# Altium PCB 贴片按键.pcbdoc
Units mm, origin at the board's own origin, x right, y up, seen from the top; angles counter-clockwise.
Board outline 29.17 x 29.3 mm, 2 copper layers (Top Layer, Bottom Layer); 1 components, 0 nets, 6 pads, 0 vias.
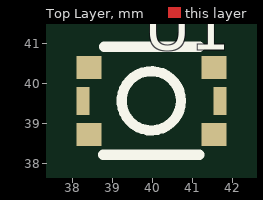
[diagram p0: Top Layer view]
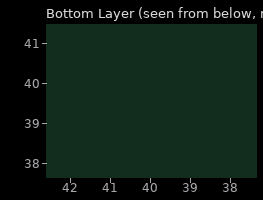
[diagram p1: Bottom Layer view, seen from below]

## Layer stack, top to bottom
Top Layer: signal copper (thickness not stored)
Dielectric: dielectric 0.32, FR-4, Dk 4.8
Bottom Layer: signal copper (thickness not stored)

## Board outline
54.567,25.4 25.4,25.4 25.4,54.702 54.567,54.702

## Components (designator, comment, footprint, x,y, rotation, side; value= is the part's Value field where it differs from the comment)
U1 "SW-SMD_4P-L3.0-W2.7-P1.66-LS3.5" SW-SMD_4P-L3.0-W2.7-P1.66-LS3.5 39.975,39.577 r0 top

## Footprints (in the part's own frame and the unit in brackets; to place one, negate y for a bottom-side part, rotate by r counter-clockwise, add the part's x,y. Pads: shape width x height; smd on the part's side, far side on the other; paste and mask are expansions set on the pad)
SW-SMD_4P-L3.0-W2.7-P1.66-LS3.5 [mm]
  rect 0.625x0.575 smd: 1(-1.562,0.837) 2(1.562,0.837) 3(-1.562,-0.837) 4(1.562,-0.837)
  rect 0.325x0.7 smd: 5(1.712,0) 6(-1.712,0)
  silkscreen extent -1.21,-1.35 1.21,1.35

## Nets (pads, with @x,y where several pads share a name; then routed paths per layer and width w, separated by ;. In a path a pad name is that pad's centre, name@x,y a point inside that pad or via, vN(x,y) a via of type N, cw(c..) or ccw(c..) an arc to the next point about the centre after c; other vN are vias at no path point)
pads on no net: U1.1 U1.2 U1.3 U1.4 U1.5 U1.6

## Silkscreen, mask and mechanical layers (free items; w line width, h text height)
Document:
  lines w0.003: 39.958,40.026 40.009,40.076